# Altium PCB Connector_PCB.PcbDoc
Units mm, origin at the board's own origin, x right, y up, seen from the top; angles counter-clockwise.
Board outline 39.62 x 47.37 mm, 2 copper layers (Top Layer, Bottom Layer); 17 components, 16 nets, 80 pads, 11 vias.
Unrouted connection lines stored in the file: 3.
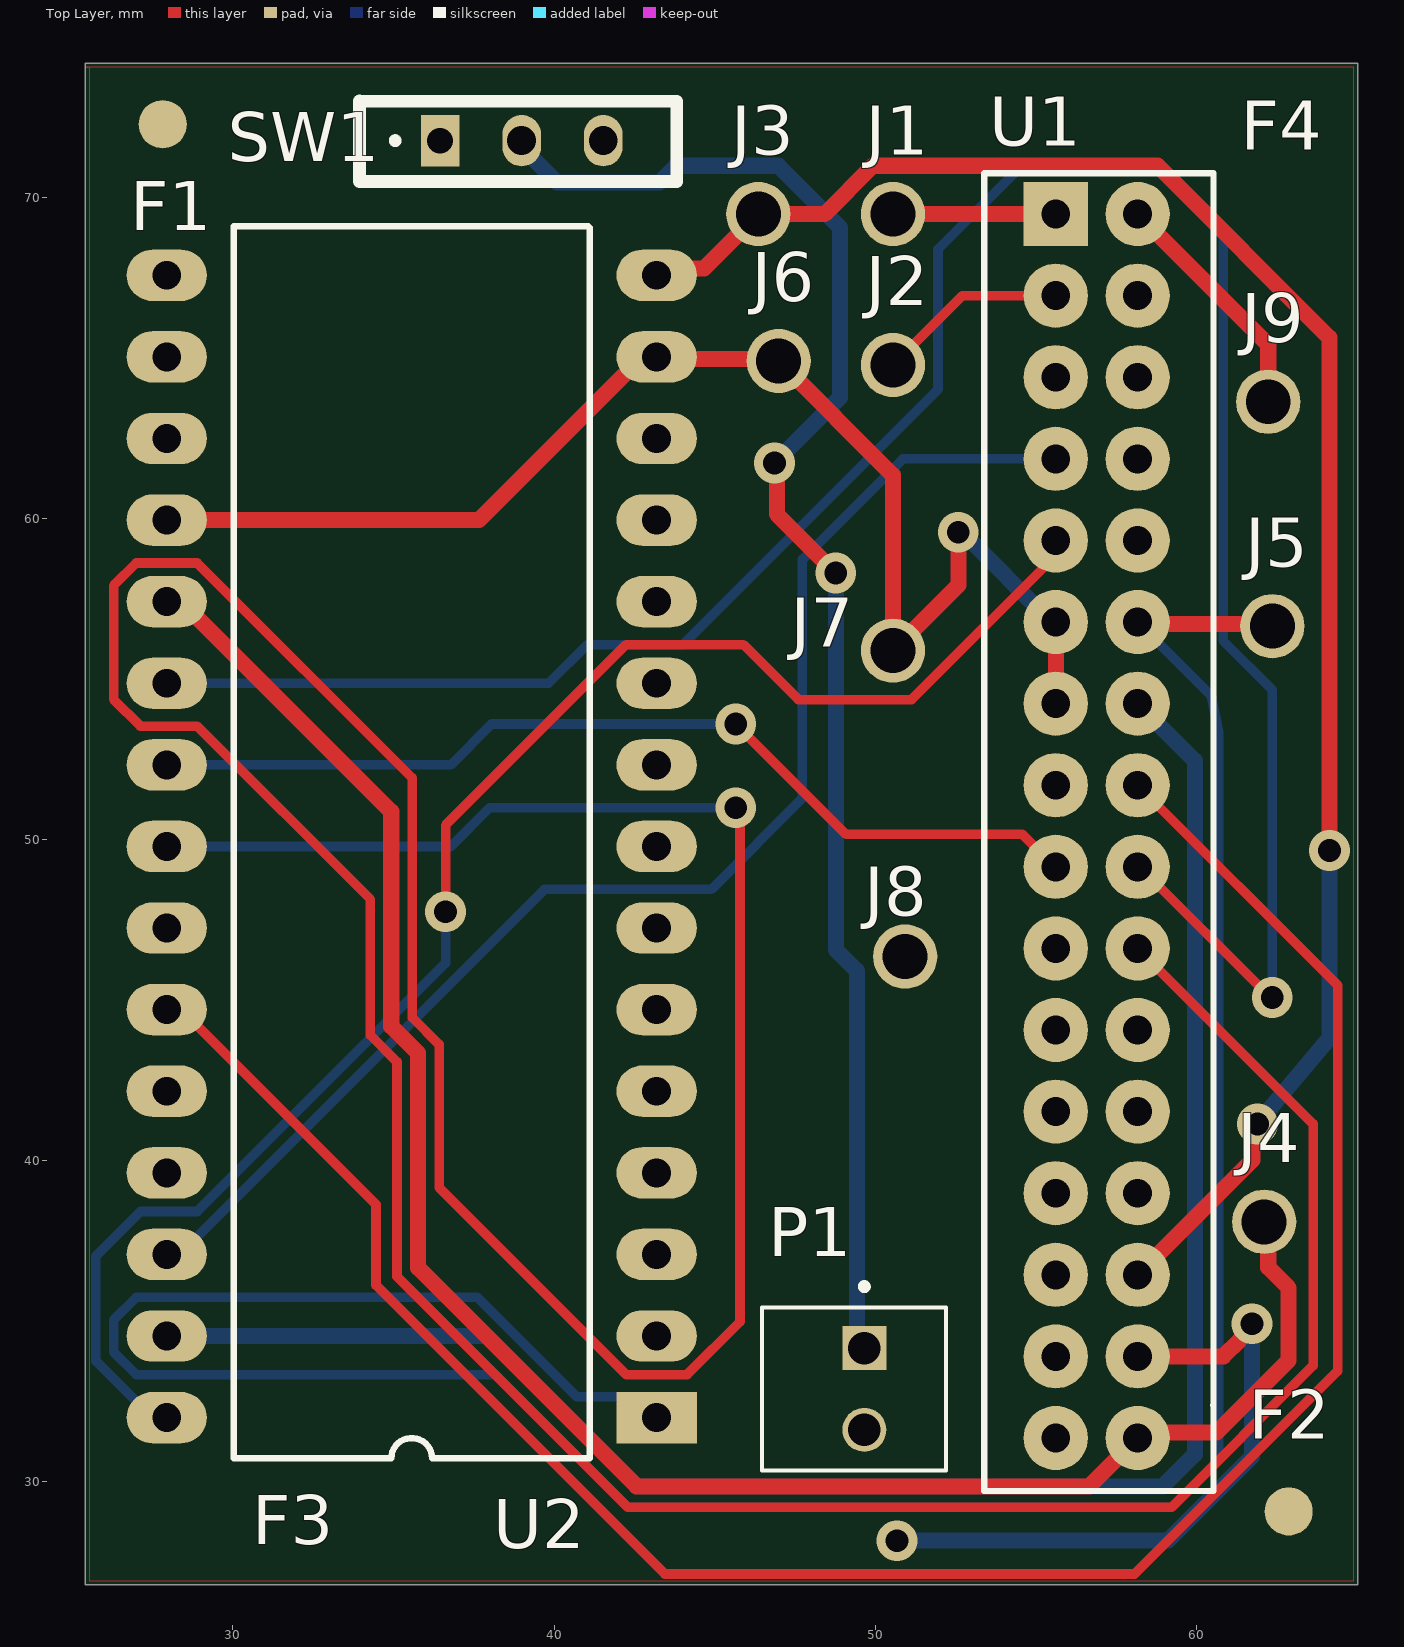
[diagram p0: Top Layer view]
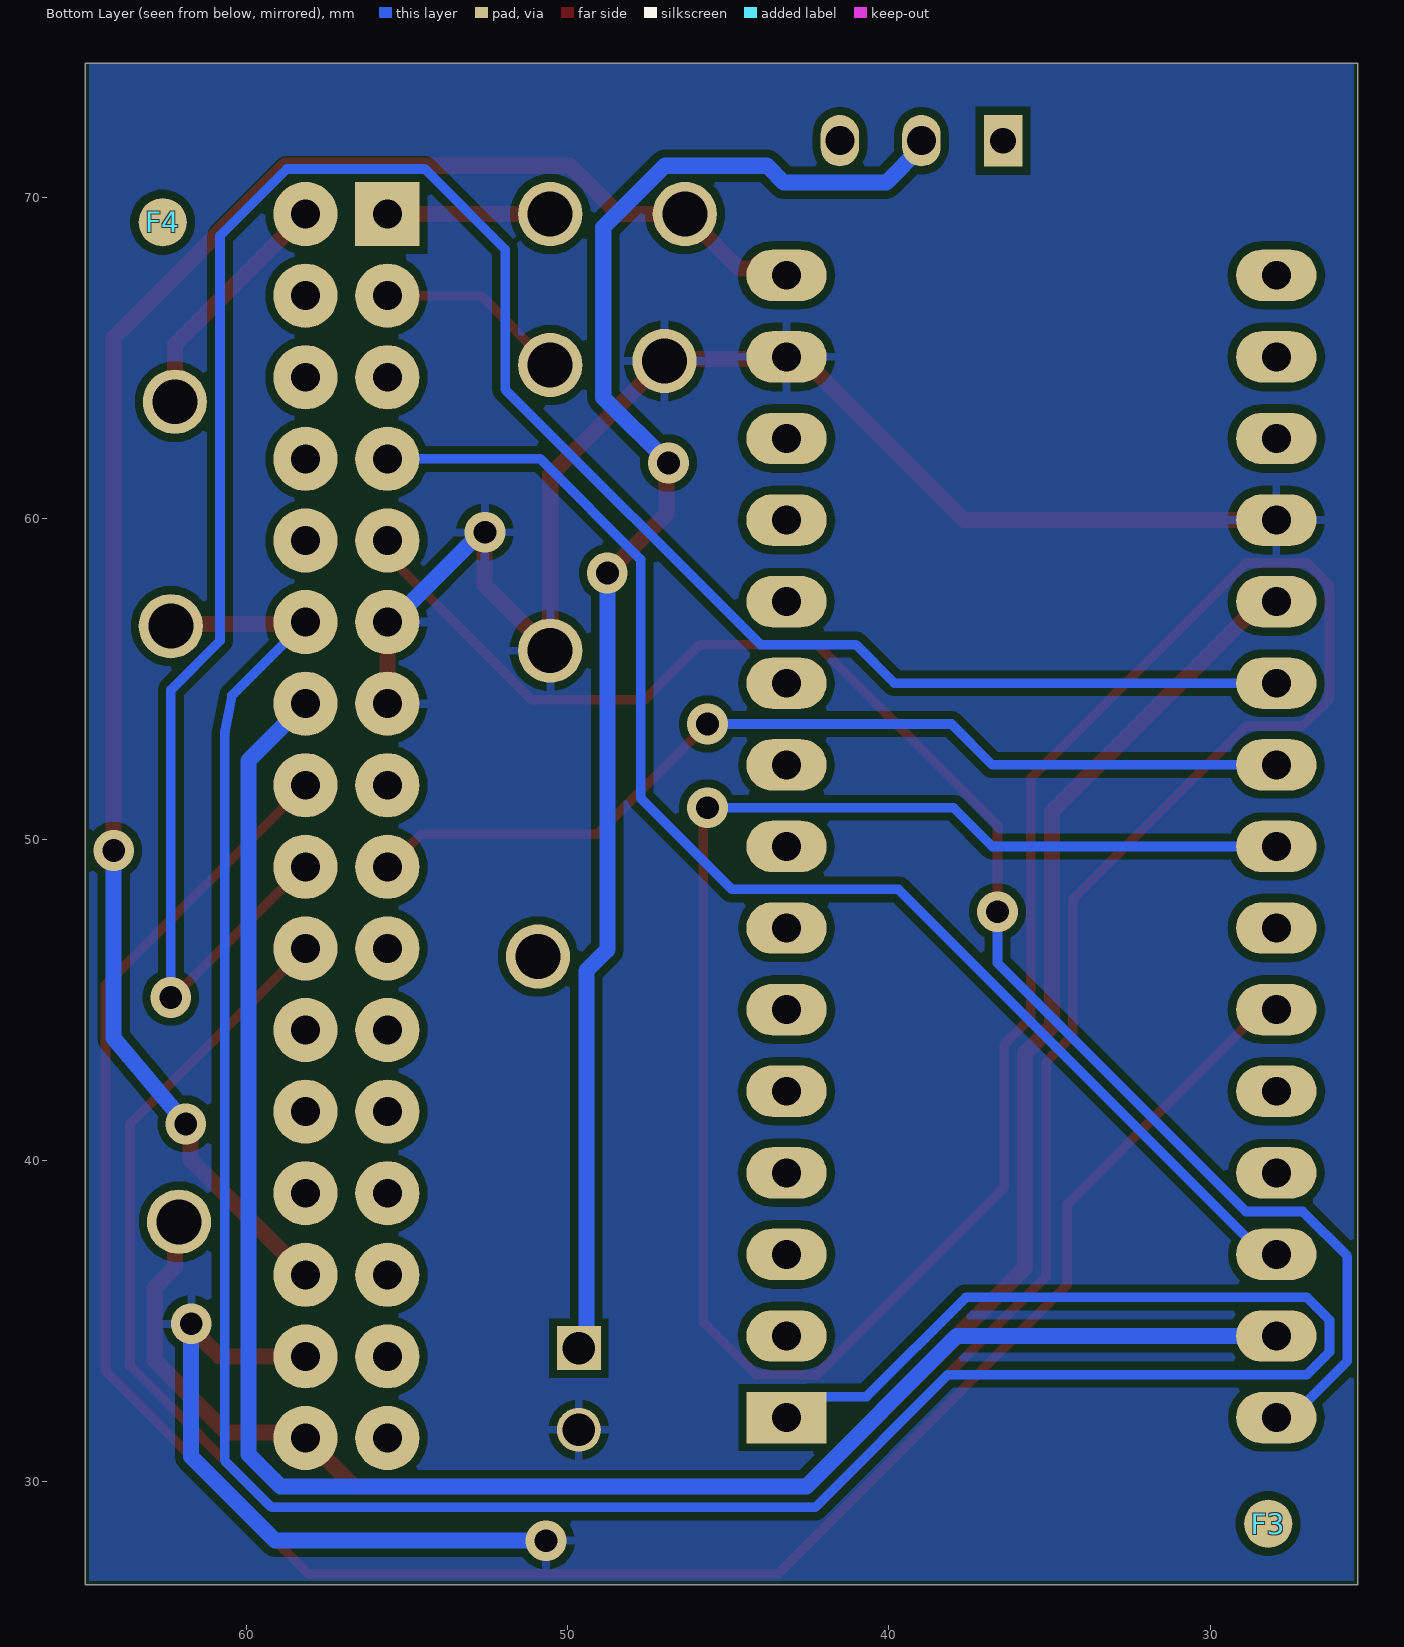
[diagram p1: Bottom Layer view, seen from below]

## Layer stack, top to bottom
Top Solder: solder mask 0.0102, Solder Resist, Dk 3.5
Top Layer: signal copper 0.0356
Dielectric 1: dielectric 0.32, FR-4, Dk 4.8
Bottom Layer: signal copper 0.0356
Bottom Solder: solder mask 0.0102, Solder Resist, Dk 3.5

## Board outline
25.4,26.797 65.024,26.797 65.024,74.168 25.4,74.168

## Design rules (kind name [scope] priority, off if disabled: settings)
Clearance [All] p1: gap=0.254 ignorepadtopadclearanceinfootprint=FALSE except(0: Arc-Hole Track-Hole SMDPad-Hole THPad-Hole Via-Hole Fill-Hole Poly-Hole Region-Hole Text-Hole)
PolygonConnect [All] p1: connectstyle=Relief reliefconductorwidth=0.254 reliefentries=4 polygonreliefangle="90 Angle" airgapwidth=0.254
RoutingVias [All] p1: holewidth=0.711 width=1.27 viastyle="Through Hole" minholewidth=0.711 minwidth=1.27 maxholewidth=0.711 maxwidth=1.27
SolderMaskExpansion [All] p1: expansion=0.102 istentingtop=FALSE
Width Width_1 [All] p1: maxlimit=0.5 minlimit=0.254 preferedwidth=0.254
Width [All] p2: maxlimit=0.254 minlimit=0.254 preferedwidth=0.254
30 further rules are at their usual default settings.

## Components (designator, comment, footprint, x,y, rotation, side; value= is the part's Value field where it differs from the comment)
F1 "FID" Fiducial_1.5mm#1 27.813,72.263 r0 top
F2 "FID" Fiducial_1.5mm#1 62.865,29.083 r0 top
F3 "FID" Fiducial_1.5mm#2 28.194,28.702 r0 top
F4 "FID" Fiducial_1.5mm#2 62.611,69.215 r0 top
J1 "ANODE" "TEST POINTS" 50.546,69.469 r0 top
J2 "GND" "TEST POINTS" 50.546,64.77 r0 top
J3 "3V3OUT" "TEST POINTS" 46.355,69.469 r0 top
J4 "SAFETY" "TEST POINTS" 62.103,38.1 r0 top
J5 "SCK" "TEST POINTS" 62.357,56.642 r0 top
J6 "GND" "TEST POINTS" 46.99,64.897 r0 top
J7 "GND" "TEST POINTS" 50.546,55.88 r0 top
J8 "VBAT" "TEST POINTS" 50.927,46.355 r0 top
J9 "CATH1" "TEST POINTS" 62.23,63.627 r0 top
P1 "KK Series Connector" "KK series connector header" 49.657,34.163 r90 top
SW1 "2.54mm slide switch" "2.54mm Mini Slide Switch" 38.989,71.755 r90 top
U1 "MOTIMOVE Module" "MOTIMOVE Module" 66.055,53.543 r0 top
U2 "Arduino Nano 33 BLE" "Arduino Nano 33 BLE" 35.164,39.929 r180 top

## Footprints (in the part's own frame and the unit in brackets; to place one, negate y for a bottom-side part, rotate by r counter-clockwise, add the part's x,y. Pads: shape width x height; smd on the part's side, far side on the other; paste and mask are expansions set on the pad)
"2.54mm Mini Slide Switch" [mm]
  oval 1.6x1.2 hole 0.9: COM(0,0) OFF(0,-2.54)
  rect 1.6x1.2 hole 0.8: ON(0,2.54)
  silkscreen extent -1.27,-4.83 1.23,5.05
"Arduino Nano 33 BLE" [mm]
  rect 2.5x1.6 hole 0.9: 1(-8.026,7.925)
  oval 2.5x1.6 hole 0.9: 2(-8.026,5.385) 3(-8.026,2.845) 4(-8.026,0.305) 5(-8.026,-2.235) 6(-8.026,-4.775) 7(-8.026,-7.315) 8(-8.026,-9.855) 9(-8.026,-12.395) 10(-8.026,-14.935) 11(-8.026,-17.475) 12(-8.026,-20.015) 13(-8.026,-22.555) 14(-8.026,-25.095) 15(-8.026,-27.635) 16(7.224,-27.635) 17(7.224,-25.095) 18(7.224,-22.555) 19(7.224,-20.015) 20(7.224,-17.475) 21(7.224,-14.935) 22(7.224,-12.395) 23(7.224,-9.855) 24(7.224,-7.315) 25(7.224,-4.775) 26(7.224,-2.235) 27(7.224,0.305) 28(7.224,2.845) 29(7.224,5.385) 30(7.224,7.925)
  silkscreen extent -5.94,-29.16 5.14,9.19
Fiducial_1.5mm#1 [mm] "1.5mm Fiducial"
  round 1.5 smd mask+0.75: 1(0,0)
Fiducial_1.5mm#2 [mm] "1.5mm Fiducial"
  round 1.5 smd far side mask+0.75: 1(0,0)
"KK series connector header" [mm]
  rect 1.37x1.37 hole 1.02: 1(0,0)
  round 1.37 hole 1.02: 2(-2.54,0)
  silkscreen extent -3.81,-2.54 2.02,3.18
"MOTIMOVE Module" [mm]
  rect 2x2 hole 0.9: 1(-10.439,15.926)
  round 2 hole 0.9: 2(-10.439,13.386) 3(-10.439,10.846) 4(-10.439,8.306) 5(-10.439,5.766) 6(-10.439,3.226) 7(-10.439,0.686) 8(-10.439,-1.854) 9(-10.439,-4.394) 10(-10.439,-6.934) 11(-10.439,-9.474) 12(-10.439,-12.014) 13(-10.439,-14.554) 14(-10.439,-17.094) 15(-10.439,-19.634) 16(-10.439,-22.174) 17(-7.889,15.926) 18(-7.889,13.386) 19(-7.889,10.846) 20(-7.889,8.306) 21(-7.889,5.766) 22(-7.889,3.226) 23(-7.889,0.686) 24(-7.889,-1.854) 25(-7.889,-4.394) 26(-7.889,-6.934) 27(-7.889,-9.474) 28(-7.889,-12.014) 29(-7.889,-14.554) 30(-7.889,-17.094) 31(-7.889,-19.634) 32(-7.889,-22.174)
  silkscreen extent -12.67,-23.83 -5.53,17.2
"TEST POINTS" [mm]
  round 2 hole 1.4: 1(0,0)

## Part data
F1 F2 F3 F4: library part FIDUCIAL, "1.5mm Fiducial", Case/Package=SMD, Manufacturer=NA, Manufacturer Part Number=NA, Supplier=NA, Supplier Part Number=NA
J1 J2 J3 J4 J5 J6 J7 J8 J9: library part "TEST POINTS", "Test Points 1.02mm"
P1: library part Connector, "CONNECTOR : KK Style - Straight Header / 02 Way / 2.54mm Pitch / With Friction Lock"
SW1: "Mouser - 710450301014042"

## Via types
v1: diameter 1.27, hole 0.711, Top Layer to Bottom Layer, 11 vias

## Nets (pads, with @x,y where several pads share a name; then routed paths per layer and width w, separated by ;. In a path a pad name is that pad's centre, name@x,y a point inside that pad or via, vN(x,y) a via of type N, cw(c..) or ccw(c..) an arc to the next point about the centre after c; other vN are vias at no path point)
3V3_IN: J3.1 U1.30 U2.15 | length 56.1
  Top Layer w0.5: U2.15 43.4,67.774 44.66,67.774 J3.1 48.419,69.469 49.923,70.973 58.789,70.973 64.135,65.627 v1(64.135,49.657) ; U1.30 61.744,40.027 61.744,41.001 v1(61.891,41.148)
  Bottom Layer w0.5: v1(61.891,41.148) 64.135,43.815 v1(64.135,49.657)
5V_EN: U1.9 U2.22 | length 30
  Top Layer w0.3: v1(45.652,53.594) 49.088,50.158 54.574,50.158 55.583,49.149 U1.9
  Bottom Layer w0.3: U2.22 36.786,52.324 38.056,53.594 v1(45.652,53.594)
Battery: J8.1 SW1.ON U1.8
Com: P1.1 SW1.COM | length 48.5
  Top Layer w0.5: v1(46.863,61.722) 46.932,61.653 46.932,60.129 v1(48.768,58.293)
  Bottom Layer w0.5: SW1.COM 38.989,71.555 40.093,70.451 43.274,70.451 43.796,70.973 46.978,70.973 48.895,69.056 48.895,63.754 v1(46.863,61.722) ; v1(48.768,58.293) 48.768,46.568 49.423,45.913 49.423,34.397 P1.1
GND: J6.1 J7.1 P1.2 U1.6 U1.7 U1.31 U2.14 U2.19 | length 62.6
  Top Layer w0.5: U2.19 37.66,59.944 42.74,65.024 U2.14 43.253,64.96 46.926,64.96 J6.1 50.546,61.341 J7.1 52.594,57.928 52.594,59.547 v1(52.578,59.563) ; U1.7 U1.6 ; U1.31 60.833,33.909 61.341,34.417
  Bottom Layer w0.5: v1(50.673,28.172) 59.105,28.172 61.722,30.789 v1(61.722,34.925) ; v1(52.578,59.563) 52.7,59.563 55.494,56.769 U1.6
NetJ1_1: J1.1 U1.1 | length 5.1
  Top Layer w0.5: J1.1 U1.1
NetJ2_1: J2.1 U1.2 | length 6
  Top Layer w0.3: J2.1 52.705,66.929 U1.2
NetJ9_1: J9.1 U1.17 | length 7.5
  Top Layer w0.5: U1.17 62.23,65.405 J9.1
PULSE1: U1.25 U2.21 | length 73.2
  Top Layer w0.3: U1.25 58.229,49.149 62.293,45.085 v1(62.357,45.085)
  Bottom Layer w0.3: U2.21 39.827,54.864 41.031,56.068 44.007,56.068 51.95,64.011 51.95,68.374 54.449,70.873 58.748,70.873 60.826,68.795 60.826,56.187 62.357,54.656 v1(62.357,45.085)
RELE1: U1.26 U2.23 | length 147
  Top Layer w0.3: v1(45.652,50.988) 45.786,50.854 45.786,34.987 44.139,33.34 42.241,33.34 36.418,39.164 36.418,43.62 35.583,44.455 35.583,51.914 28.889,58.608 26.991,58.608 26.286,57.903 26.286,54.365 27.123,53.528 28.889,53.528 34.275,48.142 34.275,43.913 35.11,43.078 35.11,36.397 42.295,29.211 59.219,29.211 63.627,33.619 63.627,36.944 ccw(c62.23,37.084) 63.627,37.224 63.627,41.148 U1.26
  Bottom Layer w0.3: U2.23 36.786,49.784 37.99,50.988 v1(45.652,50.988)
SAFETY: J4.1 U1.32 U2.20 | length 59.3
  Top Layer w0.5: U2.20 28.39,57.404 34.929,50.865 34.929,44.184 35.764,43.349 35.764,36.668 42.566,29.865 56.662,29.865 58.332,31.535 60.618,31.535 62.865,33.782 62.865,36.043 62.23,36.678 62.23,37.084
SENSE1: U1.24 U2.25 | length 68.6
  Top Layer w0.3: U2.25 28.39,44.704 34.456,38.638 34.456,36.126 43.448,27.133 58.066,27.133 64.389,33.456 64.389,45.466 U1.24
SPI_MISO: U1.5 U2.30 | length 49.5
  Top Layer w0.3: v1(36.622,47.752) 36.622,50.449 42.241,56.068 45.888,56.068 47.6,54.356 51.123,54.356 55.616,58.849 U1.5
  Bottom Layer w0.3: U2.30 27.49,32.004 25.732,33.762 25.732,37.029 27.123,38.42 28.889,38.42 36.622,46.153 v1(36.622,47.752)
SPI_MOSI: U1.23 U2.29 | length 58.5
  Bottom Layer w0.5: U2.29 37.887,34.544 42.566,29.865 58.948,29.865 59.944,30.861 59.944,52.451 U1.23
SPI_SCK: J5.1 U1.22 U2.1 | length 88.1
  Top Layer w0.5: U1.22 58.229,56.706 62.293,56.706 J5.1
  Bottom Layer w0.3: U2.1 42.54,32.654 40.702,32.654 37.608,35.748 26.991,35.748 26.286,35.043 26.286,34.045 26.991,33.34 38.166,33.34 42.295,29.211 59.219,29.211 60.683,30.675 60.683,53.319 60.452,54.483 U1.22
SPI_SS: U1.4 U2.28 | length 42.3
  Bottom Layer w0.3: U2.28 28.337,37.084 39.701,48.448 44.892,48.448 47.729,51.285 47.729,58.723 50.855,61.849 U1.4
pads on no net: F1.1 F2.1 F3.1 F4.1 SW1.OFF U1.3 U1.10 U1.11 U1.12 U1.13 U1.14 U1.15 U1.16 U1.18 U1.19 U1.20 U1.21 U1.27 U1.28 U1.29 U2.2 U2.3 U2.4 U2.5 U2.6 U2.7 U2.8 U2.9 U2.10 U2.11 U2.12 U2.13 U2.16 U2.17 U2.18 U2.24 U2.26 U2.27

## Polygon pours and split planes (outlines as drawn)
GND on Bottom Layer "GND_L02_P000" (solid, pour order 0): 25.527,74.168 25.527,26.924 64.897,26.924 64.897,74.168
Battery on Top Layer "BATTERY_L01_P001" (solid, pour order 1): 25.527,74.041 25.527,26.924 64.897,26.924 64.897,74.041 25.4,74.041